# Altium PCB RedBeanSprout_Pcb.PcbDoc
Units mil, origin at the board's own origin, x right, y up, seen from the top; angles counter-clockwise.
Board outline 1700 x 600 mil, 2 copper layers (Top Layer, Bottom Layer); 39 components, 49 nets, 163 pads, 41 vias.
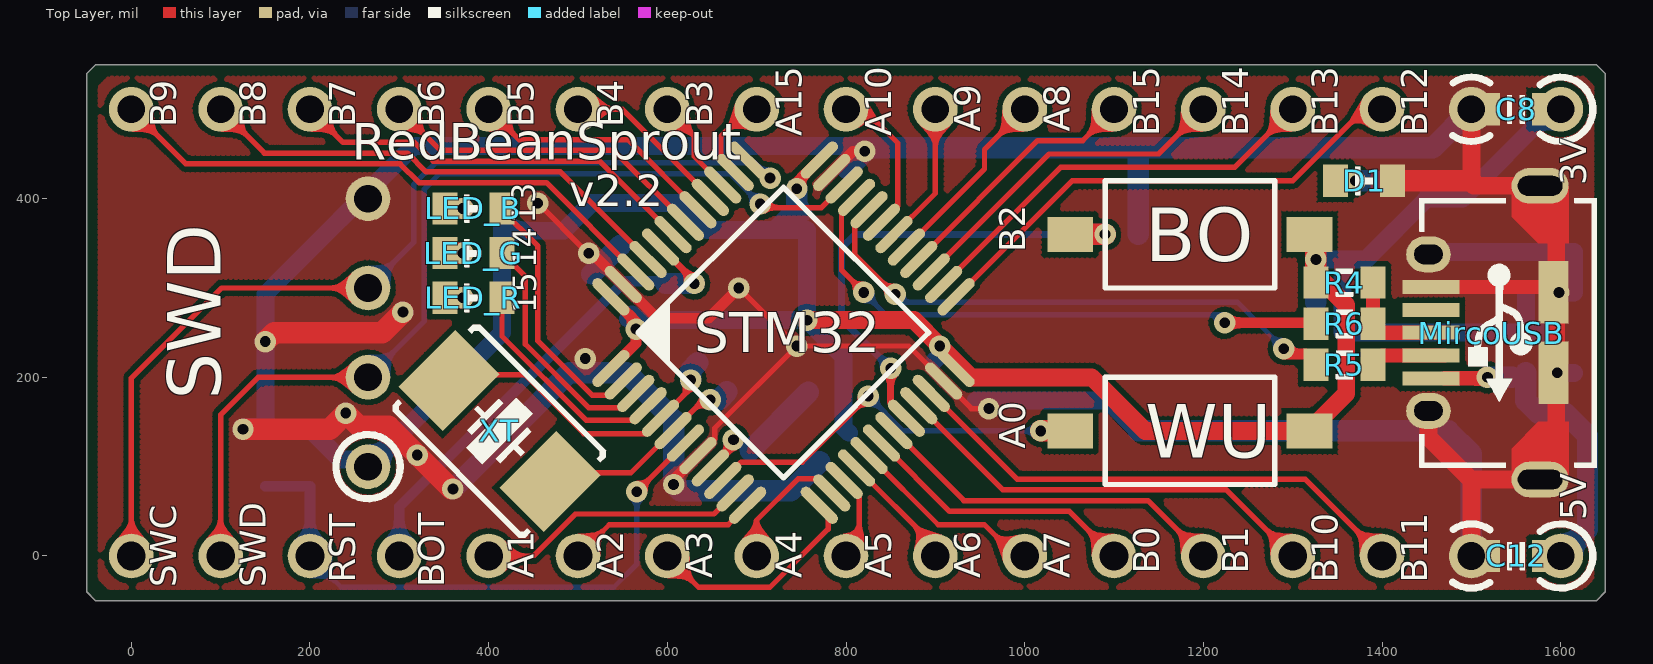
[diagram p0: Top Layer view]
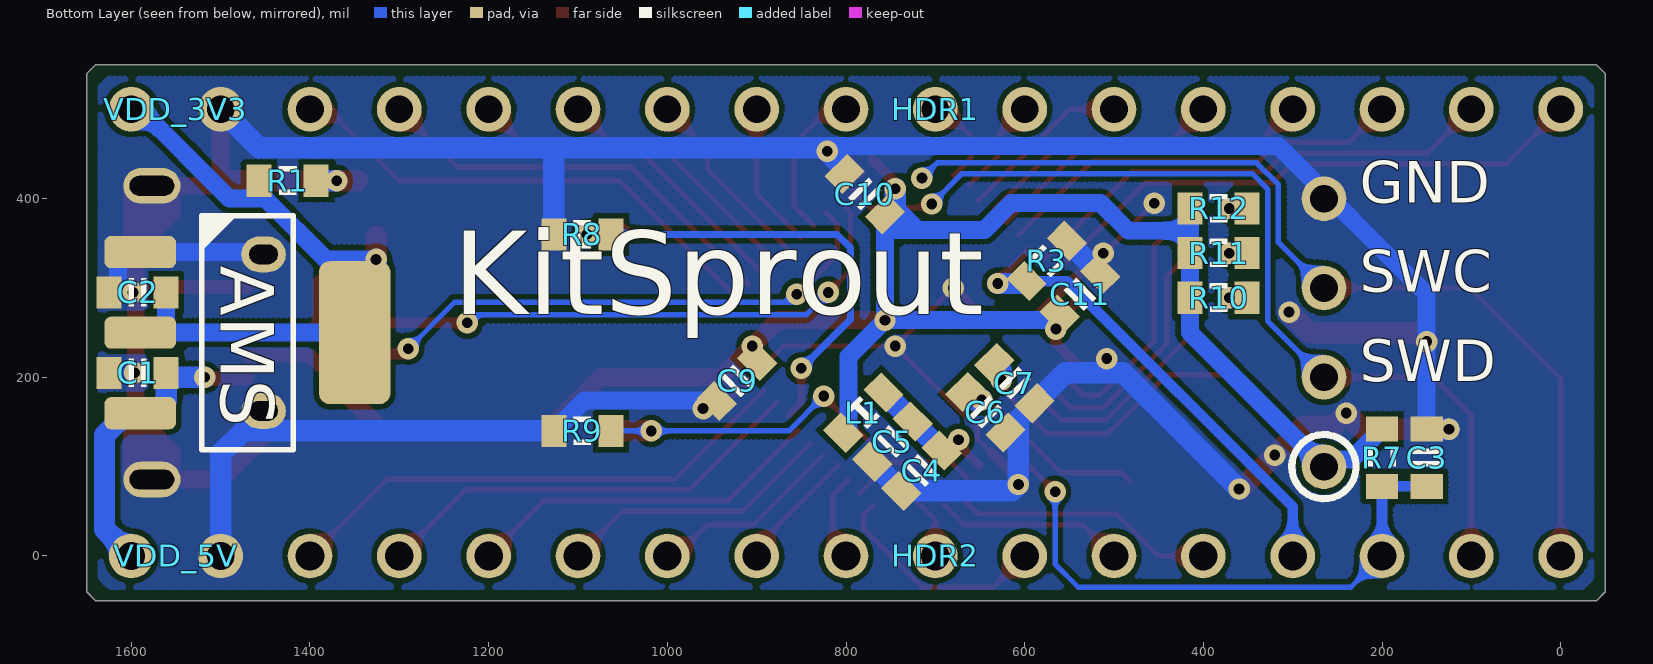
[diagram p1: Bottom Layer view, seen from below]
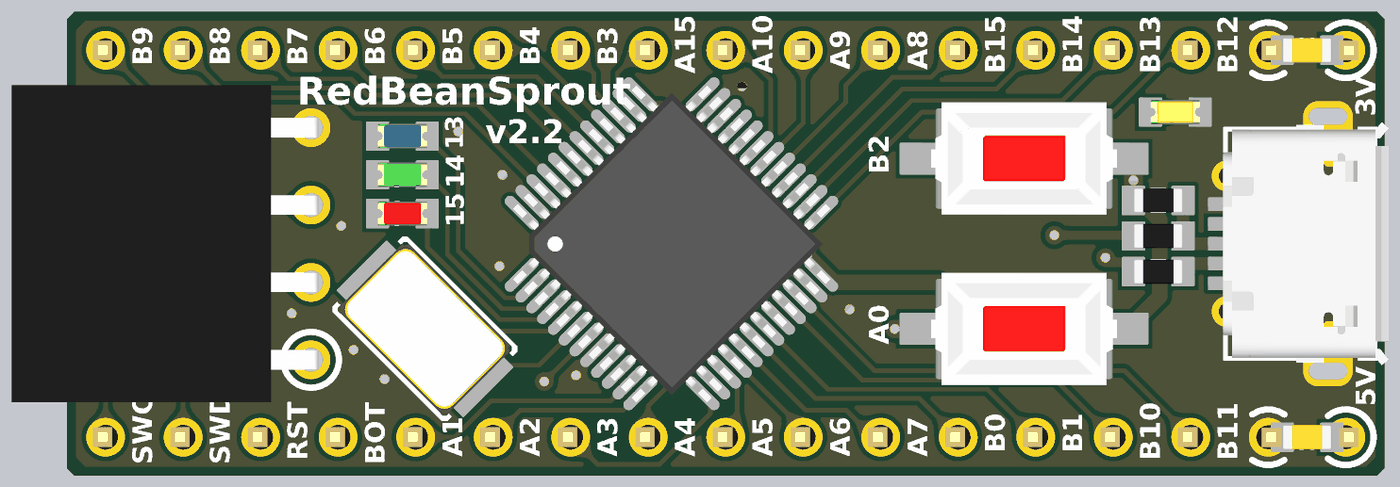
[diagram p2: 3D render of the assembled board from above, using the file's embedded part models]
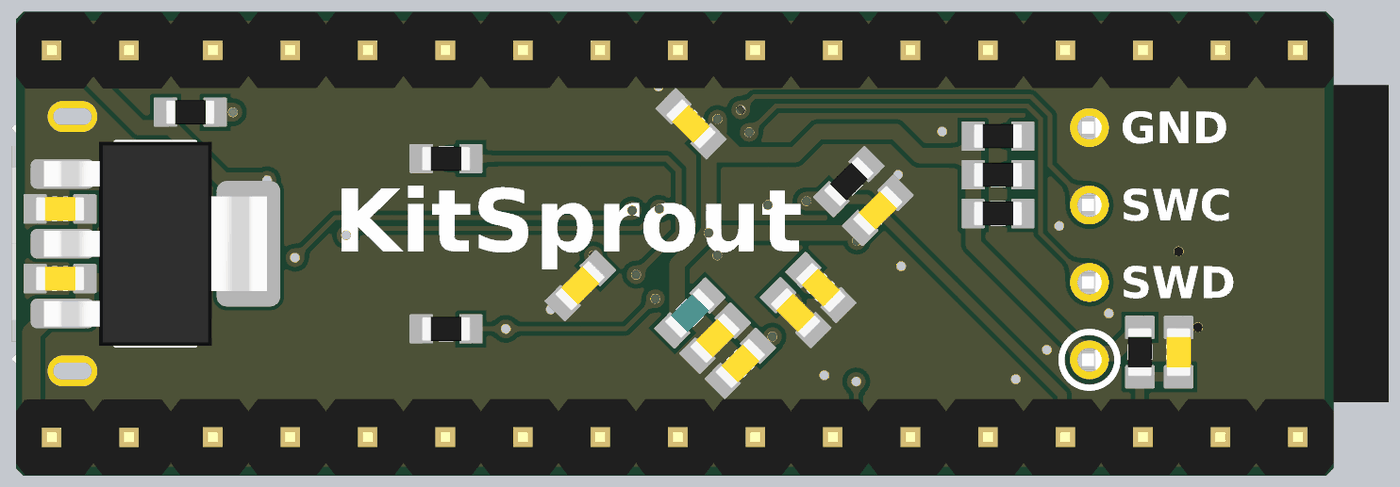
[diagram p3: 3D render of the assembled board from below, using the file's embedded part models]

## Layer stack, top to bottom
Top Solder: solder mask 0.4, Solder Resist, Dk 3.5
Top Layer: signal copper 1.4
Dielectric1: dielectric 12.6, FR-4, Dk 4.8
Bottom Layer: signal copper 1.4
Bottom Solder: solder mask 0.4, Solder Resist, Dk 3.5

## Board outline
-50,-40 -40,-50 1640,-50 1650,-40 1650,540 1640,550 -40,550 -50,540

## Design rules (kind name [scope] priority, off if disabled: settings)
Clearance Clearance_Polygon [InPolygon] p1: gap=6
Clearance [All] p2: gap=6
ComponentClearance [All] p1: gap=0 collisioncheckmode=3 verticalgap=0 showdistances=FALSE
MinimumSolderMaskSliver [All] p1: minsoldermaskwidth=4
PasteMaskExpansion [All] p1: expansion=1
PlaneConnect [All] p1: planeconnectstyle=Direct reliefexpansion=20 reliefentries=4 reliefconductorwidth=10 reliefairgap=10
PolygonConnect [All] p1: connectstyle=Direct reliefconductorwidth=10 reliefentries=4 polygonreliefangle="90 Angle" airgapwidth=10
RoutingVias [All] p1: holewidth=12 width=24 viastyle="Through Hole" minholewidth=12 minwidth=24 maxholewidth=50 maxwidth=100
SilkToSilkClearance [All] p1: silktosilkclearance=1
SilkToSolderMaskClearance [IsPad] p1: minsilkscreentomaskgap=1 clearancetoexposedcopper=TRUE
SolderMaskExpansion [All] p1: expansion=0
Width [All] p1: maxlimit=50 minlimit=6 preferedwidth=10
24 further rules are at their usual default settings.

## Components (designator, comment, footprint, x,y, rotation, side; value= is the part's Value field where it differs from the comment)
AMS "AMS1117" SOT223-3 1470,250 r270 bottom
BO "ButtonTACT_3x6x2.5_180" ButtonTACT_3x6x2.5_180 1185,360 r0 top
C1 "Cap_0603" CAP_0603 1593,205 r180 bottom
C2 "Cap_0603" CAP_0603 1593,295 r180 bottom
C3 "Cap_0603" CAP_0603 150,110 r270 bottom
C4 "Cap_0603" CAP_0603 715.47,95.47 r135 bottom locked
C5 "Cap_0603" CAP_0603 748,128 r135 bottom locked
C6 "Cap_0603" CAP_0603 644,161 r225 bottom locked
C7 "Cap_0603" CAP_0603 611.47,193.53 r225 bottom locked
C8 "Cap_0603" CAP_0603 1550,500 r0 top
C9 "Cap_0603" CAP_0603 922,196 r135 bottom locked
C10 "Cap_0603" CAP_0603 779,405 r225 bottom
C11 "Cap_0603" CAP_0603 538,293 r315 bottom
C12 "Cap_0603" CAP_0603 1550,0 r0 top
D1 "LED_0603" LED_0603_YELLOW 1380,420 r0 top
HDR1 "HDR1x15_2.54" HDR1X15_2.54_180#1 0,500 r270 bottom locked
HDR2 "HDR1x15_2.54" HDR1X15_2.54_180#2 0,0 r270 bottom locked
L1 "Ind_0603" IND_0603 780.53,160.53 r135 bottom locked
LED_B "LED_0603" LED_0603_BLUE 383,389 r0 top
LED_G "LED_0603" LED_0603_GREEN 383,339 r0 top
LED_R "LED_0603" LED_0603_RED 383,289 r0 top
MircoUSB "USB_Micro" USB_Micro-AB 1580,250 r270 top locked
R1 "Res_0603" RES_0603 1425,420 r0 bottom
R3 "Res_0603" RES_0603 575.29,330.29 r315 bottom
R4 "Res_0603" RES_0603 1358,306 r0 top
R5 "Res_0603" RES_0603 1358,214 r180 top
R6 "Res_0603" RES_0603 1358,260 r180 top
R7 "Res_0603" RES_0603 200,110 r90 bottom
R8 "Res_0603" RES_0603 1095,360 r180 bottom locked
R9 "Res_0603" RES_0603 1095,140 r180 bottom locked
R10 "Res_0603" RES_0603 383,289 r180 bottom
R11 "Res_0603" RES_0603 383,339 r180 bottom
R12 "Res_0603" RES_0603 383,389 r180 bottom
STM32 "STM32F103C" LQFP_P0.5_48 730,250 r45 top locked
SWD "HDR1x4_2.54" HDR1X4_2.54_90F 265,100 r180 top locked
VDD_3V3 "HDR1x2_2.54" HDR1X2_2.54_180 1600,500 r90 bottom locked
VDD_5V "HDR1x2_2.54" HDR1X2_2.54_180 1600,0 r90 bottom locked
WU "ButtonTACT_3x6x2.5_180" ButtonTACT_3x6x2.5_180 1185,140 r0 top
XT "XTAL_5032_2P" XT_5032_2 412,140 r315 top locked

## Footprints (in the part's own frame and the unit in brackets; to place one, negate y for a bottom-side part, rotate by r counter-clockwise, add the part's x,y. Pads: shape width x height; smd on the part's side, far side on the other; paste and mask are expansions set on the pad)
ButtonTACT_3x6x2.5_180 [mm]
  rect 1.3x1 smd: 1(-3.4,0) 2(3.4,0)
  silkscreen extent -2.41,-1.52 2.41,1.52, body extent -3.05,-1.85 3.05,1.85, height 2.5
CAP_0603 [mil]
  rect 28x36 smd: 1(-32,0) 2(32,0)
  silkscreen extent -10,-16 10,16, body extent -31,-16 31,16, height 36
HDR1X2_2.54_180 [mil]
  round 50 hole 31: 1(0,0) 2(0,-100)
  body extent -49,-150 49,50, height 323
HDR1X4_2.54_90F [mil]
  round 50 hole 31: 1(0,0) 2(0,-100) 3(0,-200) 4(0,-300)
  body extent -10,-355 386,55, height 99
HDR1X15_2.54_180#1 [mil]
  round 50 hole 31: 1(0,0) 2(0,-100) 3(0,-200) 4(0,-300) 5(0,-400) 6(0,-500) 7(0,-600) 8(0,-700) 9(0,-800) 10(0,-900) 11(0,-1000) 12(0,-1100) 13(0,-1200) 14(0,-1300) 15(0,-1400)
  body extent -49,-1450 49,50, height 323
HDR1X15_2.54_180#2 [mil]
  round 50 hole 32: 1(0,0) 2(0,-100) 3(0,-200) 4(0,-300) 5(0,-400) 6(0,-500) 7(0,-600) 8(0,-700) 9(0,-800) 10(0,-900) 11(0,-1000) 12(0,-1100) 13(0,-1200) 14(0,-1300) 15(0,-1400)
  body extent -49,-1450 49,50, height 323
IND_0603 [mil]
  rect 28x36 smd: 1(-32,0) 2(32,0)
  silkscreen extent -10,-15 10,15, body extent -31,-16 31,16, height 37
LED_0603_BLUE [mil]
  rect 28x36 smd: 1(-32,0) 2(32,0)
  silkscreen extent -10,-16 10,16, body extent -32,-16 32,16, height 24
LED_0603_GREEN [mil]
  rect 28x36 smd: 1(-32,0) 2(32,0)
  silkscreen extent -10,-16 10,16, body extent -32,-16 32,16, height 24
LED_0603_RED [mil]
  rect 28x36 smd: 1(-32,0) 2(32,0)
  silkscreen extent -10,-16 10,16, body extent -32,-16 32,16, height 24
LED_0603_YELLOW [mil]
  rect 28x36 smd: 1(-32,0) 2(32,0)
  silkscreen extent -10,-16 10,16, body extent -32,-16 32,16, height 24
LQFP_P0.5_48 [mil]
  oval 54x12 smd: 1(-165,108.27) 2(-165,88.58) 3(-165,68.9) 4(-165,49.21) 5(-165,29.53) 6(-165,9.84) 7(-165,-9.84) 8(-165,-29.53) 9(-165,-49.21) 10(-165,-68.9) 11(-165,-88.58) 12(-165,-108.27) 25(165,-108.27) 26(165,-88.58) 27(165,-68.9) 28(165,-49.21) 29(165,-29.53) 30(165,-9.84) 31(165,9.84) 32(165,29.53) 33(165,49.21) 34(165,68.9) 35(165,88.58) 36(165,108.27)
  oval 12x54 smd: 13(-108.27,-165) 14(-88.58,-165) 15(-68.9,-165) 16(-49.21,-165) 17(-29.53,-165) 18(-9.84,-165) 19(9.84,-165) 20(29.53,-165) 21(49.21,-165) 22(68.9,-165) 23(88.58,-165) 24(108.27,-165) 37(108.27,165) 38(88.58,165) 39(68.9,165) 40(49.21,165) 41(29.53,165) 42(9.84,165) 43(-9.84,165) 44(-29.53,165) 45(-49.21,165) 46(-68.9,165) 47(-88.58,165) 48(-108.27,165)
  silkscreen extent -115,-115 115,115, body extent -177,-178 177,177, height 61
RES_0603 [mil]
  rect 28x36 smd: 1(-32,0) 2(32,0)
  silkscreen extent -10,-16 10,16, body extent -31,-16 32,16, height 20
SOT223-3 [mil]
  rrect40% 36x80 smd: 1(-90.16,-120) 2(0,-120) 3(90.16,-120)
  rrect30% 160x80 smd: 4(0,120)
  silkscreen extent -131,-51 131,51, body extent -132,-144 132,144, height 71
USB_Micro-AB [mil]
  rect 15.75x64 smd: 1(51.18,-125) 2(25.59,-125) 3(0,-125) 4(-25.59,-125) 5(-51.18,-125)
  oval 40x64 hole 22 slot 50 at 90 deg mask+0: 5(-164.37,-3) 5(164.37,-3)
  oval 40x50 hole 22 slot 32 at 90 deg mask+0: 5(-87.6,-128) 5(87.6,-128)
  rect 70x34 smd mask+0: 5(-45,12) 5(45,12)
  Top Layer region: 100,29 164.37,29 164.37,-35 130,-35 100,-5
  Top Layer region: -164.37,29 -100,29 -100,-5 -130,-35 -164.37,-35
  silkscreen extent -150,-138 151,61, body extent -157,-138 157,75, height 107
XT_5032_2 [mil]
  rect 70x90 smd: 1(-80,0) 2(80,0)
  silkscreen extent -104,-68 104,68, body extent -98,-63 98,63, height 39

## Part data
AMS: "Power"
BO WU: "Button"
C1 C2 C3 C4 C5 C6 C7 C8 C9 C10 C11 C12: "Capacitor"
D1 LED_B LED_G LED_R: "LED"
HDR1 HDR2 SWD VDD_3V3 VDD_5V: "Header"
L1: "Inductor"
MircoUSB: "USB"
R1 R3 R4 R5 R6 R7 R8 R9 R10 R11 R12: "Resistor"
STM32: "MCU"
XT: "Crystal Oscillator"

## Via types
v1: diameter 24, hole 12, Top Layer to Bottom Layer, 41 vias

## Nets (pads, with @x,y where several pads share a name; then routed paths per layer and width w, separated by ;. In a path a pad name is that pad's centre, name@x,y a point inside that pad or via, vN(x,y) a via of type N, cw(c..) or ccw(c..) an arc to the next point about the centre after c; other vN are vias at no path point)
3V3: AMS.2 AMS.4 BO.2 C2.2 C8.2 C9.2 C10.2 C11.2 L1.1 R1.2 R4.1 R7.2 R10.1 R11.1 R12.1 STM32.1 STM32.24 STM32.36 STM32.48 SWD.1 VDD_3V3.1 WU.2 | length 3008.1
  Top Layer w12: STM32.48 565,261.89 v1(565,254.04) 565,238.11 STM32.1@540,213.11 ; v1@745,414 745,418.11 STM32.36
  Top Layer w20: v1@761.37,264.04 875.96,264.04 v1(905,235) 940,200 1075,200 1135,140 WU.2 ; R4.1@1326,315 1360,281 1360,182 WU.2@1328,150
  Top Layer w24: R4.1@1326,315 BO.2@1326,358
  Bottom Layer w20: R7.2 234,108 273,108 415,250 R10.1 R11.1 R12.1 ; 415,364 484,364 515,395 615,395 645,365 756.37,365 v1(756.37,264) ; C11.2@555.75,265.5 C11.2 567,264 v1(756.37,264) ; 723.13,368.13 C10.2@740,385 ; L1.1 797,144.05 797,223.37 v1(756.37,264) ; C9.2 C9.2@905.75,225 ; v1(1326,332) 1382,332 1450,400 1490,400 VDD_3V3.1@1590,500 ; AMS.4@1355.83,317.83 1355.83,250 AMS.2@1558,250 ; C2.2 1561,250 AMS.2@1584.17,250
  Bottom Layer w24: v1(745,411) 745,393.75 C10.2@750,385 ; AMS.4@1326,284 v1(1326,332)
5V: AMS.3 C1.2 C12.2 MircoUSB.1 VDD_5V.1 | length 338.4
  Top Layer w16: MircoUSB.1@1470,198.82 v1@1516.82,198.82
  Bottom Layer w24: v1(1518,200) 1546,200 ; C1.2 1561,174 1575.16,159.84 1605.16,159.84 1630,135 1630,30 VDD_5V.1
BO: BO.1 R8.2 STM32.20 | length 556.3
  Top Layer w8: v1(850,210) 850,171.76 STM32.20@864.32,157.44
  Top Layer w24: BO.1 v1(1090,360)
  Bottom Layer w8: v1(850,210) 795,265 795,345 810,360 R8.2
  Bottom Layer w24: R8.2 v1(1090,360)
BOOT0: HDR2.4 R3.2 STM32.44 | length 538.2
  Top Layer w8: STM32.44@595.68,342.56 v1@630,308.24
  Bottom Layer w12: HDR2.4 300,55 552.67,307.67 R3.2
  Bottom Layer w24: R3.2@597.92,305 v1(630,305)
GND: AMS.1 C1.1 C2.1 C3.1 C4.1 C5.1 C6.2 C7.2 C8.1 C9.1 C10.1 C11.1 C12.1 D1.2 MircoUSB.5 R3.1 R8.1 R9.1 STM32.8 STM32.23 STM32.35 STM32.47 SWD.4 VDD_3V3.2 VDD_5V.2 | length 5628.8
  Top Layer w6: v1(455,395) v1@508.64,341.36 ; STM32.47 STM32.47@553.92,300.81 ; v1(607,80) v1@607,85.24 ; STM32.8 653,131.24 653,143 v1(745,235) ; v1(680,300) v1(745,235) ; STM32.23@906.08,199.19 940.27,165 v1(960,165) ; STM32.23 870.27,235 v1(745,235)
  Top Layer w12: v1@513.86,340.86 STM32.47 588.73,266 646,266 v1(680,300) ; v1@607,85.24 STM32.8@637.44,115.68 ; STM32.35 807.73,453 v1(821,453)
  Top Layer w16: MircoUSB.5@1470,301.18 MircoUSB.5@1581.82,301.18
  Top Layer w20: MircoUSB.5@1462,162.4 1452,152.4 1452,133 1499.37,85.63 1580,85.63 1595,100.63 1595,288 1588,295 MircoUSB.5@1593,300 ; VDD_5V.2 1500,85 ; 1500,417 1502.63,414.37 1577,414.37 1580,414.37 1595,399.37 MircoUSB.5@1595,295 ; 1500,420 VDD_3V3.2
  Top Layer w24: v1(125,142) 222,142 v1(240,160) 255,145 288,145 v1(320,113) 358,75 v1(360,75) ; v1(150,240) 160,250 281,250 v1(304,273) ; D1.2 1500,420
  Bottom Layer w6: C9.1 v1@960,158
  Bottom Layer w20: C3.1 v1(150,240) 150,293 316,459 v1@821,459 ; C9.1 945.25,174 1093,174 R9.1 ; MircoUSB.5@1462,337.6 1464.56,340.16 1584.17,340.16 1615,340.16 1615,295 v1(1598,295) ; v1(1596,205) C1.1@1615,205
  Bottom Layer w24: v1(125,142) C3.1 ; v1(360,75) 490,205 554.75,205 C7.2 607,152.75 v1(607,80) 614.15,72.85 C4.1 C5.1 ; C11.1 R3.1@547.67,347.92 ; C10.1@801.63,433.63 v1(821,453) ; v1@821,457 1457,457 VDD_3V3.2 ; R9.1 1474.4,140 1500,114.4 VDD_5V.2 ; R8.1 1127,457
  other v1: 508,221 512,339
LED_B: LED_B.2 STM32.2 | length 296.2
  Top Layer w6: LED_B.2@414,388 455,347 455,240.74 515.71,180.03 534.76,180.03 STM32.2@553.92,199.19
LED_G: LED_G.2 STM32.3 | length 277
  Top Layer w6: LED_G.2 441,313 441,237 512,166 548.56,166 STM32.3@567.84,185.27
LED_R: LED_R.2 STM32.4 | length 256.7
  Top Layer w6: LED_R.2 415,246 509,152 559.17,152 578.53,171.36 STM32.4@581.76,171.36
NetD1_1: D1.1 R1.1 | length 46
  Top Layer w24: D1.1@1347,420 v1(1370,420)
  Bottom Layer w24: v1(1370,420) R1.1
NetLED_B_1: LED_B.1 R12.2 | length 40
  Top Layer w24: LED_B.1 v1(371,389)
  Bottom Layer w24: R12.2 v1(371,389)
NetLED_G_1: LED_G.1 R11.2 | length 40
  Top Layer w24: LED_G.1 v1(371,339)
  Bottom Layer w24: R11.2 v1(371,339)
NetLED_R_1: LED_R.1 R10.2 | length 40
  Top Layer w24: LED_R.1 v1(371,289)
  Bottom Layer w24: R10.2 v1(371,289)
NetMircoUSB_2: MircoUSB.2 R5.1 | length 84.3
  Top Layer w16: R5.1 1400.41,224.41 MircoUSB.2@1470,224.41
NetMircoUSB_3: MircoUSB.3 R4.2 R6.1 | length 130.1
  Top Layer w16: R4.2 R6.1 1400,250 MircoUSB.3@1470,250
PA1: HDR2.5 STM32.11 | length 305.2
  Top Layer w6: HDR2.5 450,0 497,47 652.27,47 STM32.11
PA2: HDR2.6 STM32.12 | length 213.4
  Top Layer w6: HDR2.6 535,35 668.11,35 STM32.12
PA3: HDR2.7 STM32.13 | length 252.3
  Top Layer w6: HDR2.7 635,-35 715,-35 780,30 780,46.89 STM32.13
PA4: HDR2.8 STM32.14 | length 149.9
  Top Layer w6: HDR2.8 700,40 746.62,86.62 768.11,86.62 STM32.14
PA5: HDR2.9 STM32.15 | length 97.9
  Top Layer w6: STM32.15 815,67.56 815,15 HDR2.9
PA6: HDR2.10 STM32.16 | length 139.6
  Top Layer w6: STM32.16@808.64,101.76 900,10.4 HDR2.10
PA7: HDR2.11 STM32.17 | length 220.8
  Top Layer w6: STM32.17 903.24,35 955,35 990,0 HDR2.11
PA8: HDR1.11 STM32.29 | length 213.6
  Top Layer w6: STM32.29@864.32,342.56 955,433.24 955,455 HDR1.11
PA9: HDR1.10 STM32.30 | length 164.1
  Top Layer w6: STM32.30@850.4,356.48 900,406.08 HDR1.10
PA10: HDR1.9 STM32.31 | length 174.2
  Top Layer w6: HDR1.9 820,500 858,462 858,391.92 STM32.31@836.48,370.4
PA15: HDR1.8 STM32.38 | length 126.9
  Top Layer w6: STM32.38 STM32.38@660,445.27 ; STM32.38@679.19,426.08 STM32.38@660,445.27 ; HDR1.8 690,500 660,470 STM32.38@660,445.27
PB0: HDR2.12 STM32.18 | length 312.6
  Top Layer w6: STM32.18 916.08,50 1050,50 HDR2.12
PB1: HDR2.13 STM32.19 | length 404.5
  Top Layer w6: STM32.19 931.92,62 1138,62 HDR2.13
PB3: HDR1.7 STM32.39 | length 110.3
  Top Layer w6: HDR1.7 630,470 630,447.44 STM32.39
PB4: HDR1.6 STM32.40 | length 189.3
  Top Layer w6: HDR1.6 549.6,500 STM32.40 ; STM32.40@651.36,398.24 STM32.40@651.36,398.64
PB5: HDR1.5 STM32.41 | length 280.8
  Top Layer w6: HDR1.5 434,466 555.76,466 STM32.41
PB6: HDR1.4 STM32.42 | length 372.6
  Top Layer w6: HDR1.4 346,454 539.92,454 STM32.42
PB7: HDR1.3 STM32.43 | length 464.5
  Top Layer w6: HDR1.3 237,463 317,463 338,442 524.08,442 STM32.43
PB8: HDR1.2 STM32.45 | length 548.2
  Top Layer w6: HDR1.2 149,451 309,451 330,430 480.4,430 STM32.45
PB9: HDR1.1 STM32.46 | length 640
  Top Layer w6: HDR1.1 61,439 301,439 322,418 464.56,418 STM32.46
PB10: HDR2.14 STM32.21 | length 492.7
  Top Layer w6: STM32.21@878.24,171.36 975.6,74 1226,74 HDR2.14
PB11: HDR2.15 STM32.22 | length 584.6
  Top Layer w6: STM32.22@892.16,185.27 991.44,86 1314,86 HDR2.15
PB12: HDR1.15 STM32.25 | length 563.7
  Top Layer w6: STM32.25 1053.11,420 1300,420 1380,500 HDR1.15
PB13: HDR1.14 STM32.26 | length 471.9
  Top Layer w6: STM32.26 1040.27,435 1235,435 HDR1.14
PB14: HDR1.13 STM32.27 | length 380
  Top Layer w6: STM32.27 1027.44,450 1150,450 HDR1.13
PB15: HDR1.12 STM32.28 | length 288.2
  Top Layer w6: STM32.28 1014.6,465 1065,465 HDR1.12
RST: C3.2 HDR2.3 R7.1 STM32.7 | length 686.7
  Top Layer w6: v1(565.92,72) STM32.7@623.52,129.6
  Top Layer w20: HDR2.3 HDR2.3@205,0
  Bottom Layer w6: HDR2.3 235,-35 540,-35 565.92,-9.08 v1(565.92,72)
  Bottom Layer w12: C3.2 R7.1 HDR2.3
SWC: HDR2.1 STM32.37 SWD.3 | length 1063.5
  Top Layer w6: HDR2.1 0,199 101,300 SWD.3 SWD.3@265,308
  Bottom Layer w6: SWD.3@265,308 273,308 316,351 316,415.7 340.3,440 698,440 v1(715,423)
SWD: HDR2.2 STM32.34 SWD.2 | length 1088.4
  Top Layer w6: HDR2.2 100,158 142,200 SWD.2 SWD.2@265,208 ; v1@713,390 772.56,390 STM32.34@794.73,412.16
  Bottom Layer w6: SWD.2@250,200 SWD.2 328,263 328,410.73 345.27,428 670,428 v1(704,394)
U_DM: R5.2 STM32.32 | length 613.8
  Top Layer w6: STM32.32@822.56,384.32 809.86,371.62 809.86,337.14 v1@855,292
  Top Layer w12: v1@1290,226 1314,226 R5.2
  Bottom Layer w6: v1@855,284 1238,284 v1(1290,232)
  other v1: 855,293
U_DP: R6.2 STM32.33 | length 634.6
  Top Layer w6: STM32.33@808.64,398.24 795,384.6 795,320 v1(820,295)
  Top Layer w12: v1(1224,261) R6.2@1325,261
  Bottom Layer w6: v1(820,295) 845,270 v1@1224,270
VDDA: C4.2 C5.2 L1.2 STM32.9 | length 132.5
  Top Layer w10: STM32.9@651.36,101.76 v1@680,130.4
  Bottom Layer w24: C4.2 L1.2
  other v1: 674,130
WU: R9.2 STM32.10 WU.1 | length 484.8
  Top Layer w6: STM32.10@665.27,87.84 682.44,105 751,105 v1(825,179)
  Top Layer w24: v1(1018,140) WU.1
  Bottom Layer w6: v1(825,179) 864,140 v1(1018,140) R9.2
XT_I: C7.1 STM32.5 XT.1 | length 330.5
  Top Layer w6: XT.1@370.43,196.57 376.86,203 440.56,203 506.56,137 575.24,137 v1@627,188.76
  Bottom Layer w24: v1(626,197) 626,208.05 C7.1
XT_O: C6.1 STM32.6 XT.2 | length 219.6
  Top Layer w6: XT.2@481.57,83.43 491.14,93 559.08,93 v1@641.08,175
  Bottom Layer w24: v1(648,175) 658,175 C6.1
pads on no net: MircoUSB.4

## Polygon pours and split planes (outlines as drawn)
GND on Bottom Layer "Bottom Layer-No Net" (hatched 45Degree grid 4 track 6, remove dead copper, pour order 4): -25,535 -35,525 -35,505 -35,350 -35,-25 -25,-35 0,-35 1625,-35 1635,-25 1635,0 1635,525 1625,535
GND on Top Layer "Bottom Layer-No Net" (hatched 45Degree grid 4 track 6, remove dead copper, pour order 3): -25,535 -35,525 -35,505 -35,350 -35,-25 -25,-35 0,-35 1625,-35 1635,-25 1635,0 1635,525 1625,535

## Silkscreen, mask and mechanical layers (free items; w line width, h text height)
Top Overlay:
  circle w8: c265,100 r36
  lines w8: 1479.17,-29.36 ccw(c1500,0) 1520.64,-29.49 ; 1479.17,470.64 ccw(c1500,500) 1520.64,470.51 ; 1479.36,29.49 cw(c1500,0) 1520.83,29.36 ; 1479.36,529.49 cw(c1500,500) 1520.83,529.36 ; 1576.86,-27.58 ccw(c1600,0) 1576.86,27.58 ; 1576.86,472.42 ccw(c1600,500) 1576.86,527.58
  text "B9" at 60,480 h50 r90
  text "B8" at 160,480 h50 r90
  text "B7" at 260,480 h50 r90
  text "B6" at 360,480 h50 r90
  text "B5" at 460,480 h50 r90
  text "B4" at 560,480 h50 r90
  text "B3" at 660,480 h50 r90
  text "A9" at 960,475 h50 r90
  text "A8" at 1060,475 h50 r90
  text "A15" at 760,470 h50 r90
  text "A10" at 860,470 h50 r90
  text "B15" at 1160,470 h50 r90
  text "B14" at 1260,470 h50 r90
  text "B13" at 1360,470 h50 r90
  text "B12" at 1460,470 h50 r90
  text "RedBeanSprout" at 247,430 h70
  text "3V" at 1638,415 h50 r90
  text "v2.2" at 490,380 h60
  text "13" at 461,372 h45 r90
  text "B2" at 1010,340 h50 r90
  text "14" at 462,322 h45 r90
  text "15" at 462,272 h45 r90
  text "A0" at 1010,120 h50 r90
  text "5V" at 1638,40 h50 r90
  text "B0" at 1160,-20 h50 r90
  text "B1" at 1260,-20 h50 r90
  text "A1" at 460,-25 h50 r90
  text "A2" at 560,-25 h50 r90
  text "A3" at 660,-25 h50 r90
  text "A4" at 760,-25 h50 r90
  text "A5" at 860,-25 h50 r90
  text "A6" at 960,-25 h50 r90
  text "A7" at 1060,-25 h50 r90
  text "RST" at 260,-30 h50 r90
  text "B10" at 1360,-30 h50 r90
  text "B11" at 1460,-30 h50 r90
  text "SWC" at 60,-35 h50 r90
  text "SWD" at 160,-35 h50 r90
  text "BOT" at 360,-35 h50 r90
Bottom Overlay:
  circle w8: c265,100 r36
  text "GND" at 225,380 h80
  text "SWC" at 225,280 h80
  text "KitSprout" at 1240,240 h160
  text "SWD" at 225,180 h80
Mechanical 1:
  the board outline again, w2
Drill Drawing:
  text ".Legend" at 1788.5,-46.5 h60

## Dimensions
1640,550 to 1640,-50 on Mechanical 13
-50,540 to 1650,540 on Mechanical 13